# Altium PCB OBDII-Ist.PcbDoc
Units mm, origin at the board's own origin, x right, y up, seen from the top; angles counter-clockwise.
Board outline 60.3 x 40.3 mm, 2 copper layers (Top, Bottom); 77 components, 64 nets, 292 pads, 46 vias.
Unrouted connection lines stored in the file: 5.
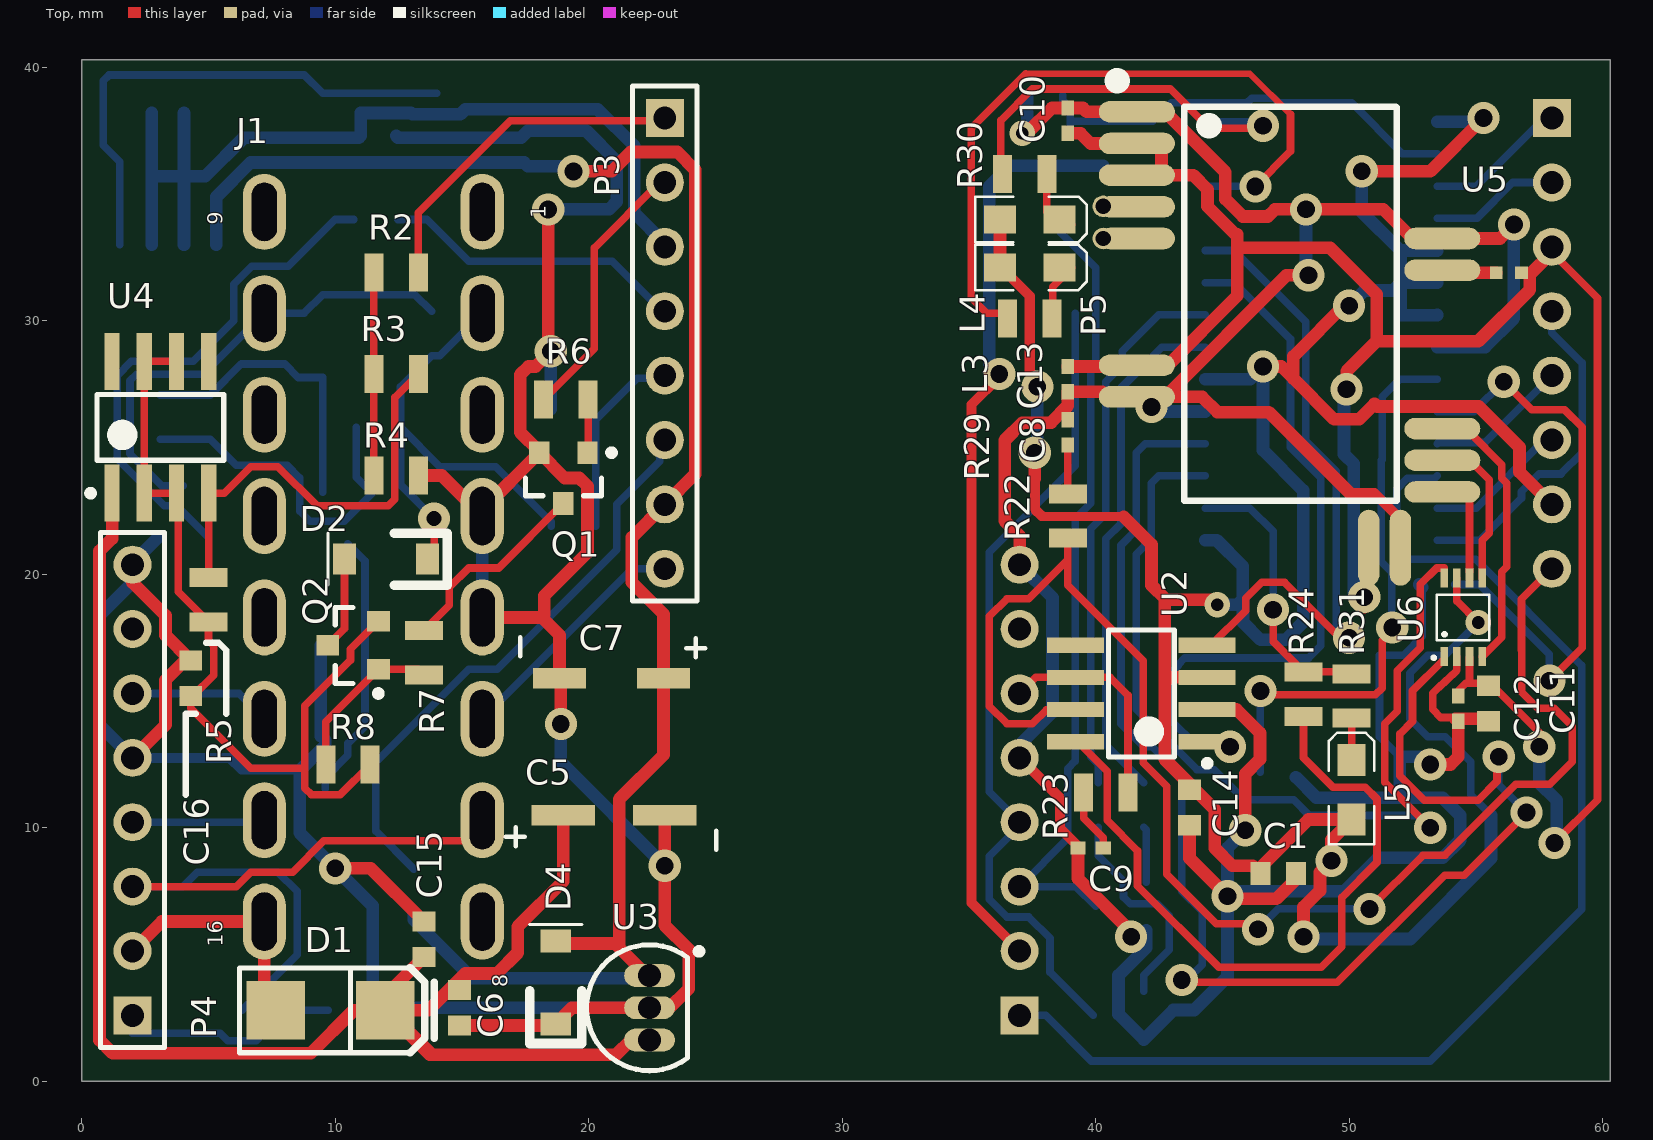
[diagram p0: Top view]
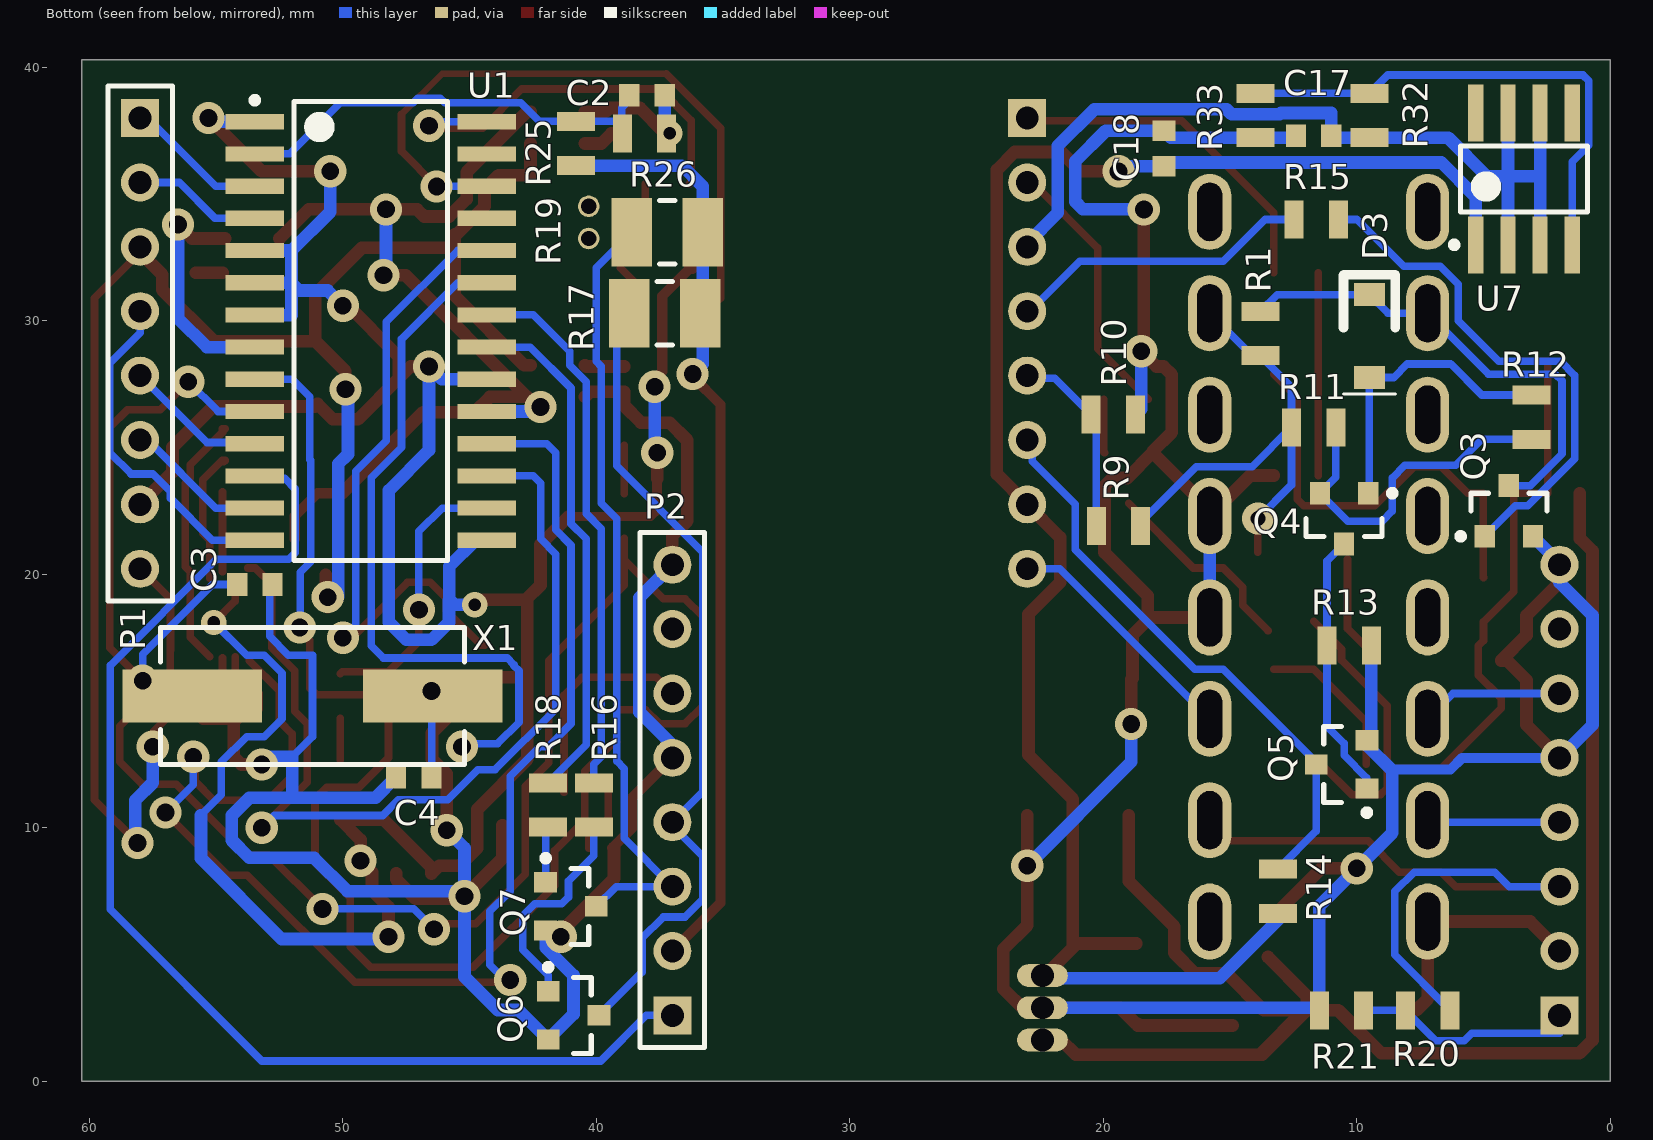
[diagram p1: Bottom view, seen from below]

## Layer stack, top to bottom
Top: signal copper 0.0356
Dielectric: core 0.32, FR-4, Dk 4.8
Bottom: signal copper 0.0356

## Board outline
0,0 0,40.3 60.3,40.3 60.3,0

## Design rules (kind name [scope] priority, off if disabled: settings)
Clearance [All] p1: gap=0.2
PolygonConnect [All] p1: connectstyle=Relief reliefconductorwidth=0.254 reliefentries=4 polygonreliefangle="90 Angle" airgapwidth=0.254
RoomDefinition Power_ [InComponentClass('Power_')] p1: confinementstyle=ConfineIn formatcopy=TRUE lockcomponents=FALSE outline 0,0 25,0 25,40 0,40
RoutingVias [All] p1: holewidth=0.7 width=1.27 viastyle="Through Hole" minholewidth=0.3 minwidth=1.27 maxholewidth=0.7 maxwidth=1.27
SilkscreenOverComponentPads [All] p1: minsilkscreentomaskgap=0.254
SolderMaskExpansion [All] p1: expansion=0.102
Width Width_GND [InNet('GND')] p1: maxlimit=0.5 minlimit=0.2 preferedwidth=0.5
Width Width_5V [InNet('+5V')] p2: maxlimit=0.5 minlimit=0.2 preferedwidth=0.5
Width Width_3.3V [InNet('+3.3V')] p3: maxlimit=0.5 minlimit=0.2 preferedwidth=0.5
Width Width_12V [InNet('+12V')] p4: maxlimit=0.5 minlimit=0.2 preferedwidth=0.5
Width Width_VBAT [InNet('VBAT')] p5: maxlimit=0.5 minlimit=0.2 preferedwidth=0.5
Width [All] p6: maxlimit=0.3 minlimit=0.2 preferedwidth=0.3
27 further rules are at their usual default settings.

## Classes and differential pairs
component class Power_: C5 C6 C7 C15 C16 C17 C18 D1 D2 D3 D4 J1 P3 P4 Q1 Q2 Q3 Q4 Q5 R1 R2 R3 R4 R5 R6 R7 R8 R9 R10 R11 R12 R13 R14 R15 R20 R21 R32 R33 U3 U4 U7
component class OBDII-Ist: C1 C2 C3 C4 C8 C9 C10 C11 C12 C13 C14 L3 L4 L5 P1 P2 P5 Q6 Q7 R16 R17 R18 R19 R22 R23 R24 R25 R26 R29 R30 R31 U1 U2 U5 U6 X1

## Components (designator, comment, footprint, x,y, rotation, side; value= is the part's Value field where it differs from the comment)
C1 "0.1uF" 1608[0603] 47.2,8.2 r0 top
C2 "0.1uF" 1608[0603] 38,38.9 r180 bottom
C3 "27pF" 1608[0603] 53.472,19.6 r180 bottom
C4 "27pF" 1608[0603] 47.2,12 r0 bottom
C5 "2.2uF" Panasonic_Ñ 21,10.5 r270 top
C6 "0.1uF" 1608[0603] 14.9,2.9 r90 top
C7 "10uF" Panasonic_B 20.9,15.9 r90 top
C8 "560pF" 0402 38.9,25.6 r270 top
C9 "560pF" 0402 39.8,9.2 r0 top
C10 "X5R/16V" 0402 38.9,37.9 r90 top
C11 "0.1uF" 1608[0603] 55.5,14.9 r270 top
C12 "X5R/16V" 0402 54.3,14.7 r90 top
C13 "X5R/16V" 0402 38.9,27.7 r90 top
C14 "0.1uF" 1608[0603] 43.7,10.8 r270 top
C15 "0.1uF" 1608[0603] 13.5,5.6 r270 top
C16 "0.1uF" 1608[0603] 4.3,15.9 r270 top
C17 "0.1uF" 1608[0603] 11.7,37.3 r180 bottom
C18 "0.1uF" 1608[0603] 17.6,36.8 r270 bottom
D1 "FM4001-W" SMA,2.8mm 9.8,2.8 r0 top
D2 "MMSD4148T1G" SOD123 12,20.6 r0 top
D3 "MMSD4148T1G" SOD123 9.5,29.4 r90 bottom
D4 "MMSZ5232B" SOD123 18.7,3.9 r270 top
J1 "DEV-09911" "DEV-09911 - II" 11.5,20.3 r90 top
L3 "APT2012SYCK" LED-0805 37.4,32.1 r0 top
L4 "APT2012SYCK" LED-0805 37.4,34 r0 top
L5 "APT2012SYCK" LED-0805 50.1,11.5 r90 top
P1 "68000-108HLF" HDR1X8 58,38 r270 bottom
P2 "68000-108HLF" HDR1X8 37,2.6 r90 bottom
P3 "66951-008LF" HDR1X8 23,38 r270 top
P4 "66951-008LF" HDR1X8 2,2.6 r90 top
P5 "MHDR1X2" MHDR1X2 40.3,33.25 r90 top
Q1 "MMBT3904LT1G" SOT23 19,23.8 r270 top
Q2 "MMBT3906LT1G" SOT23 10.7,17.2 r180 top
Q3 "MMBT3904LT1G" SOT23 4,22.5 r90 bottom
Q4 "MMBT3906LT1G" SOT23 10.5,22.2 r270 bottom
Q5 "MMBT3904LT1G" SOT23 10.6,12.5 r0 bottom
Q6 "MMBT3904LT1G" SOT23 40.9,2.6 r180 bottom
Q7 "MMBT3904LT1G" SOT23 41,6.9 r180 bottom
R1 "22k" ERA-0805 13.8,29.5 r270 bottom
R2 "2.2k" ERA-0805 12.4,31.9 r0 top
R3 "470R" ERA-0805 12.4,27.9 r180 top
R4 "2.2k" ERA-0805 12.4,23.9 r180 top
R5 "470R" ERA-0805 5,19 r270 top
R6 "4.7k" ERA-0805 19.1,26.9 r180 top
R7 "4.7k" ERA-0805 13.5,16.9 r90 top
R8 "10k" ERA-0805 10.5,12.5 r0 top
R9 "10k" ERA-0805 19.4,21.9 r180 bottom
R10 "22k" ERA-0805 19.6,26.3 r0 bottom
R11 "10k" ERA-0805 11.7,25.8 r180 bottom
R12 "47k" ERA-0805 3.1,26.2 r270 bottom
R13 "10k" ERA-0805 10.3,17.2 r180 bottom
R14 "4.7k" ERA-0805 13.1,7.5 r90 bottom
R15 "4.7k" ERA-0805 11.6,34 r0 bottom
R16 "2.2k" ERA-0805 40.1,10.9 r90 bottom
R17 "510R" ERJ-1210 37.3,30.3 r180 bottom
R18 "2.2k" ERA-0805 41.9,10.9 r90 bottom
R19 "510R" ERJ-1210 37.2,33.5 r180 bottom
R20 "47k" ERA-0805 7.2,2.8 r180 bottom
R21 "33k" ERA-0805 10.6,2.8 r180 bottom
R22 "100R" ERA-0805 38.9,22.3 r270 top
R23 "100R" ERA-0805 40.4,11.4 r0 top
R24 "4.7k" ERA-0805 48.2,15.275 r90 top
R25 "47k" ERA-0805 40.8,37 r270 bottom
R26 "10k" ERA-0805 38.1,37.4 r0 bottom
R29 "470R" ERA-0805 37.4,30.1 r0 top
R30 "470R" ERA-0805 37.2,35.8 r0 top
R31 "470R" ERA-0805 50.1,15.2 r270 top
R32 "560" ERA-0805 9.5,38.1 r90 bottom
R33 "750" ERA-0805 14,38.1 r90 bottom
U1 "ELM327SM" SOIC127P1030X264-28N 48.9,29.6 r180 bottom
U2 "MCP2551-I/SN" SOIC8N 41.8,15.3 r180 top
U3 "LP2950-50LPRE3" "TO-92 - II" 22.4,2.9 r0 top
U4 "LM317LM/NOPB" SOIC8N 3.1,25.8 r90 top
U5 "BLE112-A" "BLE112-A - II" 47.6,30.7 r0 top
U6 "TXB0102DCUR" TXB0102DCUR 54.5,18.3 r90 top
U7 "LM317LM/NOPB" SOIC8N 3.4,35.6 r90 bottom
X1 "ABLS-4.000MHZ-B2-T" HC-49/US 51.2,15.2 r180 bottom

## Footprints (in the part's own frame and the unit in brackets; to place one, negate y for a bottom-side part, rotate by r counter-clockwise, add the part's x,y. Pads: shape width x height; smd on the part's side, far side on the other; paste and mask are expansions set on the pad)
0402 [mm] "Chip Capacitor, Body 1.0x0.5mm, IPC High Density"
  rect 0.6x0.5 smd: 1(-0.5,0) 2(0.5,0)
  body extent -0.55,-0.3 0.55,0.3, height 1.3
1608[0603] [mm] "Chip Capacitor, Body 1.6x0.8mm, IPC High Density"
  rect 0.8x0.9 smd: 1(-0.7,0) 2(0.7,0)
  body extent -0.87,-0.48 0.87,0.48, height 1.3
"BLE112-A - II" [mm] "BLE112 Bluetooth Smart Module"
  round 0.85 smd: 1(-7.05,7.55) 1(-4.9,7.55) 2(-7.05,6.3) 2(-4.9,6.3) 3(-7.05,5.05) 3(-4.9,5.05) 4(-7.05,3.8) 4(-4.9,3.8) 5(-7.05,2.55) 5(-4.9,2.55) 9(-7.05,-2.45) 9(-4.9,-2.45) 10(-7.05,-3.7) 10(-4.9,-3.7) 20(3.175,-10.725) 20(3.175,-8.575) 21(4.425,-10.725) 21(4.425,-8.575) 22(5,-7.45) 22(7.15,-7.45) 23(5,-6.2) 23(7.15,-6.2) 24(5,-4.95) 24(7.15,-4.95) 29(5,1.3) 29(7.15,1.3) 30(5,2.55) 30(7.15,2.55)
  rect 2.15x0.85 smd: 1(-5.975,7.55) 2(-5.975,6.3) 3(-5.975,5.05) 4(-5.975,3.8) 5(-5.975,2.55) 9(-5.975,-2.45) 10(-5.975,-3.7) 22(6.075,-7.45) 23(6.075,-6.2) 24(6.075,-4.95) 29(6.075,1.3) 30(6.075,2.55)
  rect 0.85x2.15 smd: 20(3.175,-9.65) 21(4.425,-9.65)
  silkscreen extent -6.76,-7.8 4.27,8.78, body extent -5.98,-9.65 6.08,8.45, height 2.3
"DEV-09911 - II" [mm] "OBD-II Connector"
  oval 3x1.7 hole 1 slot 2.3 at 0 deg: 1(14,-4.3) 2(10,-4.3) 3(6,-4.3) 4(2,-4.3) 5(-2,-4.3) 6(-6,-4.3) 7(-10,-4.3) 8(-14,-4.3) 9(14,4.3) 10(10,4.3) 11(6,4.3) 12(2,4.3) 13(-2,4.3) 14(-6,4.3) 15(-10,4.3) 16(-14,4.3)
  body extent -14.85,-4.7 14.85,4.7, height 4.1
ERA-0805 [mm] "Chip Resistor; Body 2 x 1.25 mm"
  rect 0.75x1.5 smd: 1(-0.875,0) 2(0.875,0)
  body extent -1,-0.63 1,0.63, height 0.5
ERJ-1210 [mm] "Chip Resistor; Body 3.2 x 2.5 mm (LxW typ)"
  rect 1.6x2.7 smd: 1(-1.4,0) 2(1.4,0)
  silkscreen extent -0.3,-1.25 0.3,1.25
HC-49/US [mm]
  rect 5.5x2.1 smd: 1(-4.75,0) 2(4.75,0)
  silkscreen extent -6,-2.7 6,2.7, body extent -5.7,-2.4 5.7,2.4, height 4.3
HDR1X8 [mm] "Connector; Header; 8 Position"
  rect 1.5x1.5 hole 0.9: 1(0,0)
  round 1.5 hole 0.9: 2(2.54,0) 3(5.08,0) 4(7.62,0) 5(10.16,0) 6(12.7,0) 7(15.24,0) 8(17.78,0)
  silkscreen extent -1.27,-1.27 19.05,1.27
LED-0805 [mm] "LED, Body 2 x 1.25 mm"
  rect 1.25x1.1 smd: 1(-1.175,0) 2(1.175,0)
  silkscreen extent -2.15,-0.9 2.25,0.9, body extent -1,-0.63 1,0.63, height 0.75
MHDR1X2 [mm] "Connector; Header; 2 Position"
  round 0.85 hole 0.6: 1(0,0) 2(1.27,0)
Panasonic_B [mm] "Panasonic Ñ size code electrolytic capacitor"
  rect 0.8x2.1 smd paste+0: 1(0,-2.05)
  rect 0.8x2.1 smd: 2(0,2.05)
  silkscreen extent 0.82,-3.7 1.63,3.6
Panasonic_Ñ [mm] "Panasonic Ñ size code electrolytic capacitor"
  rect 0.8x2.5 smd paste+0: 1(0,-2)
  rect 0.8x2.5 smd: 2(0,2)
  silkscreen extent 0.47,-4.28 1.38,4.03
SMA,2.8mm [mm] "DO-214AC/SMA"
  rect 2.3x2.3 smd: 1(-2.15,0) 2(2.175,0)
  silkscreen extent -3.57,-1.68 4.1,1.68, body extent -2.6,-1.3 2.6,1.3, height 2.39
SOD123 [mm] "Diode SOD123, Gull-wing"
  rect 0.91x1.22 smd: 1(-1.635,0) 2(1.635,0)
  silkscreen extent -2.29,-1.02 2.41,1.02, body extent -1.85,-0.8 1.85,0.8, height 1.27
SOIC8N [mm] "SOIC, 8-Leads, Body 5.0x4.0mm (max), Pitch 1.27mm, IPC Medium Density"
  rect 2.25x0.6 smd: 1(-2.6,1.905) 2(-2.6,0.635) 3(-2.6,-0.635) 4(-2.6,-1.905) 5(2.6,-1.905) 6(2.6,-0.635) 7(2.6,0.635) 8(2.6,1.905)
  silkscreen extent -2.73,-2.5 1.3,2.88, body extent -2,-2.5 2,2.5, height 1.75
SOIC127P1030X264-28N [mm] "SOIC, 28-Leads, Body 18.1x7.6mm (max), Pitch 1.27mm, IPC Medium Density"
  rect 2.3x0.6 smd: 1(-4.575,8.255) 2(-4.575,6.985) 3(-4.575,5.715) 4(-4.575,4.445) 5(-4.575,3.175) 6(-4.575,1.905) 7(-4.575,0.635) 8(-4.575,-0.635) 9(-4.575,-1.905) 10(-4.575,-3.175) 11(-4.575,-4.445) 12(-4.575,-5.715) 13(-4.575,-6.985) 14(-4.575,-8.255) 15(4.575,-8.255) 16(4.575,-6.985) 17(4.575,-5.715) 18(4.575,-4.445) 19(4.575,-3.175) 20(4.575,-1.905) 21(4.575,-0.635) 22(4.575,0.635) 23(4.575,1.905) 24(4.575,3.175) 25(4.575,4.445) 26(4.575,5.715) 27(4.575,6.985) 28(4.575,8.255)
  silkscreen extent -4.7,-9.05 3.03,9.23, body extent -3.79,-9.04 3.8,9.04, height 2.64
SOT23 [mm] "SOT23, 3-Leads, Body 3.0x2.6mm, Pitch 0.95mm"
  rect 0.9x0.8 smd: 1(-1,0.95) 2(-1,-0.95) 3(1,0)
  silkscreen extent -1.12,-1.5 0.7,2.03, body extent -1.25,-1.46 1.23,1.46, height 1.01
"TO-92 - II" [mm] "TO, Flat Index; 3 In-Line, Axial Leads; Body Dia. 4.5mm; Leads 0.51 x 0.48 mm (max)"
  oval 2x0.9 hole 0.9: 1(0,1.27) 2(0,0) 3(0,-1.27)
  silkscreen extent -2.48,-2.48 2.07,2.48
TXB0102DCUR [mm] "2-Bit Bidirectional Voltage-Level Translator with Auto Direction Sensing and +/-15-kV ESD Protect"
  rect 0.75x0.3 smd: 1(-1.55,0.75) 2(-1.55,0.25) 3(-1.55,-0.25) 4(-1.55,-0.75) 5(1.55,-0.75) 6(1.55,-0.25) 7(1.55,0.25) 8(1.55,0.75)
  silkscreen extent -1.6,-1.04 0.9,1.17, body extent -1.2,-1.05 1.2,1.05, height 0.9

## Part data
C1 C2 C11 C14 C15 C16: library part CGA3E2X7R1E104K080AA, "Surface-Mount Ceramic Multilayer Capacitor, 0.1uF, X7R, 10% Tolerance, 0603 Size, 25V"
C3 C4: library part CC0603JRNPO9BN270, "Surface-Mount Ceramic Multilayer Capacitor, 27pF, 5% Tolerance, 0603 Size, 50V"
C5: library part EEE-1HA2R2NR, "CAP ELECT 2.2UF SV 50V SMD"
C6 C17 C18: library part C0603C104K5RACTU, "Surface-Mount Ceramic Multilayer Capacitor, 0.1uF, 10% Tolerance, 0603 Size, 50V"
C7: library part EEE-1AA100NR, "CAP ELECT 10UF SV 10V SMD"
C8 C9: library part C0402C561J5GACTU, "Surface-Mount Ceramic Multilayer Capacitor, 560pF, 5% Tolerance, 0402 Size, 50V"
C10 C12 C13: library part "Cap Semi", "Capacitor (Semiconductor SIM Model)"
D1: "1 Amp 50V  Rectifier"
D2 D3: "High Conductance Fast Diode"
D4: "Zener Diodes 5.6 Volt 0.5W 5%"
J1: library part OBDII_DEV-09911, "OBD-II Connector"
L3 L4 L5: "Typical BLUE SiC LED"
P1 P2: "Header, 8-Pin, 2.54 pitch, 1 row"
P3 P4: "Connector, 8-Pin, 2.54 pitch, 1 row"
P5: "Header, 2-Pin"
Q1 Q3 Q5 Q6 Q7: library part MMBT3904L, "NPN 3904 General Purpose Amplifier"
Q2 Q4: library part MMBT3906L, "PNP 3906 General Purpose Amplifier"
R1 R10: library part ERA6AEB223V, "Rectangular Thick Film Chip Resistor, 22 kOhm, 0.1% Tolerance, 0805 Size, 0.125 W"
R2 R4 R16 R18: library part ERA6AEB222V, "Rectangular Thick Film Chip Resistor, 2.2 kOhm, 0.1% Tolerance, 0805 Size, 0.125 W"
R3 R5 R29 R30 R31: library part ERA6AEB471V, "Rectangular Thick Film Chip Resistor, 470 Ohm, 0.1% Tolerance, 0805 Size, 0.125 W"
R6 R7 R14 R15 R24: library part ERA6AEB472V, "Rectangular Thick Film Chip Resistor, 4.7 kOhm, 0.1% Tolerance, 0805 Size, 0.125 W"
R8 R9 R11 R13 R26: library part ERA6AEB103V, "Rectangular Thick Film Chip Resistor, 10 kOhm, 0.1% Tolerance, 0805 Size, 0.125 W"
R12 R20 R25: library part ERA6AEB473V, "Rectangular Thick Film Chip Resistor, 47 kOhm, 0.1% Tolerance, 0805 Size, 0.125 W"
R17 R19: library part ERJ14NF5100U, "Rectangular Thick Film Chip Resistor, 510 Ohm, 1% Tolerance, 1210 Size, 0.5 W"
R21: library part ERA6AEB333V, "Rectangular Thick Film Chip Resistor, 33 kOhm, 0.1% Tolerance, 0805 Size, 0.125 W"
R22 R23: library part ERA6AEB101V, "Rectangular Thick Film Chip Resistor, 100 Ohm, 0.1% Tolerance, 0805 Size, 0.125 W"
R32: library part ERJ6ENF5600V, "Rectangular Thick Film Chip Resistor, 560 Ohm, 1% Tolerance, 0805 Size, 0.125 W"
R33: library part ERJ6ENF7500V, "Rectangular Thick Film Chip Resistor, 750 Ohm, 1% Tolerance, 0805 Size, 0.125 W"
U1: library part ELM327_SOIC, "OBDII Interpreter IC"
U2: "IC TRANSCEIVER CAN HI-SPD 8-SOIC"
U3: "Adjustable Micropower Voltage Regulator With Shutdown; 5V; 100 mA"
U4 U7: library part LM317LM, "3-terminal adjustable regulator in SO8"
U5: "BLE112 Bluetooth Smart Module"
U6: "2-Bit Bidirectional Voltage-Level Translator with Auto Direction Sensing and +/-15-kV ESD Protect"
X1: "CRYSTAL 4.000 MHZ 18PF SMD"

## Free pads (board coordinates)
  rect 0.5x0.5 smd: 0(55.8,31.9) 0(56.8,31.9)

## Via types
v1: diameter 1.27, hole 0.7, Top to Bottom, tented both sides, 36 vias
v2: diameter 1, hole 0.5, Top to Bottom, tented both sides, 3 vias
v3: diameter 1.27, hole 0.711, Top to Bottom, tented both sides, 2 vias
v4: diameter 1.27, hole 0.7, Top to Bottom, tented bottom, 2 vias
v5: diameter 1.27, hole 0.7, Top to Bottom, tented top, 2 vias
v6: diameter 1.27, hole 0.6, Top to Bottom, tented both sides, 1 vias

## Nets (pads, with @x,y where several pads share a name; then routed paths per layer and width w, separated by ;. In a path a pad name is that pad's centre, name@x,y a point inside that pad or via, vN(x,y) a via of type N, cw(c..) or ccw(c..) an arc to the next point about the centre after c; other vN are vias at no path point)
+3.3V: C10.1 C11.1 C12.2 C13.2 C17.2 P1.3 P3.3 pad.0 R32.1 U5.2 U5.3 U5.9 U5.20 U5.29 U6.3 U7.2 U7.3 U7.6 U7.7 | length 116.7
  Top w0.3: C12.2@54.2,15.3 54.6,15.7 C11.1@55.5,15.7 ; 54.75,15.7 U6.3@54.75,16.7 ; C11.1@55.665,15.6 57.5,13.765 v1(57.5,13.2) ; P1.3@58,32.7 59.8,30.9 59.8,11.1 v1(58.1,9.4)
  Top w0.5: C13.2 40.4,28.2 U5.9@40.45,28.25 ; 39.2,37.4 39.4,37.4 39.8,37 U5.2@40.45,37 ; U5.9@42.6,28.25 42.847,28.25 45.582,30.985 45.582,33 ; U5.2@42.6,37 42.6,35.75 43.85,35.75 44.415,35.185 44.415,34.519 45.519,33.415 45.582,33.415 45.582,33 ; v1(49.9,27.3) 49.9,28.011 51.085,29.196 ; v1@50.6,18.7 v1@50.675,18.775 ; U5.20@50.675,19.975 v1@50.675,18.775 ; v1@50.785,18.885 v1@50.675,18.775 ; U5.29@54.75,31.9 pad.0@55.8,31.9 ; C11.1 C11.1@55.665,15.6 ; P1.3@58,32.7 57.124,31.824 57.124,31.224 55.096,29.196 51.085,29.196 ; 45.582,33 45.697,32.885 49.249,32.885 51.085,31.049 51.085,29.196
  Bottom w0.5: U7.3 2.765,35.7 ; U7.6 2.765,35.7 ; U7.2 4.035,35.7 ; U7.7 4.035,35.7 ; P3.3 23,33.06 21.8,34.26 21.8,36.9 20.35,38.35 15.136,38.35 14.936,38.15 13.036,38.15 12.986,38.2 11,38.2 C17.2 10.925,37.225 R32.1 6.391,37.225 4.866,35.7 4.035,35.7 ; v1(49.9,27.3) 49.8,27.2 49.8,24.738 50.185,24.353 v1@50.185,19.115 ; v1@50.185,19.215 v1@50.6,18.8 ; v1(57.5,13.2) 57.5,11.776 58.185,11.091 58.185,9.485 v1(58.1,9.4) ; 2.765,35.7 4.035,35.7
  other v1: 50.6,19.1
+5V: C1.1 C7.1 C14.1 C18.2 D4.1 L3.1 L4.1 L5.1 P1.7 P3.7 R14.1 U1.1 U1.5 U1.6 U1.7 U1.15 U1.20 U2.3 U3.1 U6.7 U7.1 | length 199.4
  Top w0.3: U6.7 54.25,18.95 v2(55.1,18.1)
  Top w0.35: 37.9,22.3 37.925,22.275 41.103,22.275
  Top w0.4: L3.1@36.286,32.1 37.35,31.036 ; 37.4,30.986 37.4,30.1 37.4,28 v1@37.9,27.5 ; 37.6,23.778 37.6,22.572 37.872,22.3 37.9,22.3
  Top w0.5: D4.1@18.7,5.435 21.035,5.435 21.2,5.27 ; v3(19.4,35.9) 20.896,35.9 21.656,36.66 23.497,36.66 24.2,35.957 24.2,23.96 P3.7 21.7,21.46 21.7,19.682 22.95,18.432 C7.1 22.95,12.878 21.2,11.128 21.2,5.27 ; U3.1@22.4,4.07 21.2,5.27 ; L3.1 L3.1@36.286,32.1 ; L3.1@36.225,32.2 L4.1@36.225,33.8 ; 37.6,23.778 v1(37.6,24.8) ; 41.103,22.275 42.2,21.178 42.2,19.571 42.771,19 ; U2.3 42.935,15.935 42.725,15.725 ; v2@44.6,19 42.771,19 ; v1(46.6,28.2) 47.324,28.2 47.8,27.724 ; v1(48.2,5.7) 48.2,6.872 48.85,7.522 48.85,8.25 v1(49.3,8.7) 49.3,9.525 L5.1 48.397,10.325 46.5,8.428 C1.1 46.2,8.5 45.4,8.5 44.7,9.2 44.7,10.728 42.725,12.703 42.725,15.725 ; v1@49.9,30.7 47.8,28.6 47.8,27.724 ; v1(50.5,35.9) 53.2,35.9 v1(55.3,38) ; P1.7 56.725,24.035 56.725,25.012 55.112,26.625 51.101,26.625 51.001,26.725 50.391,26.115 49.409,26.115 47.8,27.724 ; 42.725,15.725 42.725,18.954 42.771,19
  Bottom w0.3: v2(55.1,18.1) 53.8,16.8 53.1,16.8 52.4,16.1 52.4,14.3 53.1,13.6 53.8,13.6 54.8,12.6 54.8,11.3 55.6,10.5
  Bottom w0.5: U7.1 5.305,34.893 6.662,36.25 17.45,36.25 C18.2 19.2,36.1 v3(19.4,35.9) ; R14.1 13.1,6.37 15.4,4.07 U3.1@22.4,4.07 ; v1(37.6,24.8) 37.7,24.9 v1(37.7,27.4) ; U1.15 44.779,21.345 45.8,20.324 45.8,19 ; U1.20 44.33,27.7 46.1,27.7 v1(46.6,28.2) 46.6,24.9 48.185,23.315 48.185,18.109 47.491,17.415 46.509,17.415 45.815,18.109 45.815,18.985 45.8,19 ; v2(44.8,18.8) 45.6,18.8 45.8,19 ; v1(48.2,5.7) 48.285,5.615 52.415,5.615 55.6,8.8 55.6,10.5 ; v1(50,30.6) 50.6,31.2 51.725,31.2 52.025,31.5 ; v1(50.5,35.9) 50.5,34.3 52.025,32.775 ; U1.6@53.47,31.5 52.025,31.5 ; U1.7 53.465,30.225 52.025,30.225 52.025,31.5 ; U1.5 52.025,32.775 ; U1.1 v1@55.155,37.855 ; 52.025,31.5 52.025,32.775
+12V: C5.1 C6.2 C15.2 D1.2 U3.3 U4.1 | length 62.8
  Top w0.5: U4.1 1.195,21.413 0.7,20.918 0.7,1.622 1.222,1.1 9.028,1.1 10.728,2.8 D1.2 ; C15.2 11.975,3.375 D1.2 ; C5.1 19,7.9 17.2,6.1 17.2,5.07 16.38,4.25 15.122,4.25 13.672,2.8 12.072,2.8 13.822,1.05 ; U3.3 21.667,1.63 21.087,1.05 13.822,1.05 ; D1.2 13.725,1.05 13.822,1.05
"CAN-H 6": P1.8 R22.2 U2.7 | length 55.3
  Top w0.3: R22.2 38.9,20.583 ; U2.7 38.062,14.665 37.497,14.1 36.503,14.1 35.8,14.803 35.8,18.337 36.503,19.04 37.357,19.04 38.9,20.583 ; v1(46.4,6) 46.185,6.215 44.751,6.215 42.8,8.166 42.8,11.636 41.875,12.561 41.875,16.591 38.9,19.566 38.9,20.583 ; v1(50.8,6.8) 52.915,8.915 53.781,8.915 56.581,11.715 57.915,11.715 58.8,12.6 58.8,14 58.085,14.715 57.451,14.715 56.815,15.351 56.815,16.985 56.8,17 56.8,19.02 P1.8
  Bottom w0.3: v1(46.4,6) 47.2,6.8 v1(50.8,6.8)
CAN-H_P: J1.6 P3.8 | length 9.7
  Bottom w0.3: J1.6 21.72,20.22 P3.8
"CAN-L 14": P2.6 R23.2 U2.6 | length 8.7
  Top w0.3: P2.6 37.635,15.935 U2.6 40.565,15.935 41.275,15.225 R23.2
CAN-L_P: J1.14 P4.6 | length 5.6
  Bottom w0.3: P4.6 6.2,15.3 J1.14
GND: C1.2 C2.2 C3.2 C4.2 C5.2 C6.1 C7.2 C8.1 C9.1 C10.2 C11.2 C12.1 C13.1 C14.2 C15.1 C16.1 C17.1 C18.1 D4.2 J1.4 J1.5 P2.5 P2.8 P4.5 P4.8 Q1.2 Q3.2 Q5.2 Q6.2 Q7.2 R4.1 R10.1 R13.2 R21.1 R26.1 R33.1 U1.8 U1.19 U2.2 U3.2 U5.1 U5.10 U5.21 U5.30 U6.2 | length 279.4
  Top w0.3: C12.1@54.2,14.3 54.15,14.35 53.622,14.35 53.3,14.672 53.3,15.3 53.537,15.537 54.225,16.175 54.25,16.25 U6.2
  Top w0.4: P2.5 38.6,11.16 38.6,9.972 C9.1@39.372,9.2 ; 50.03,23.2 50.9,23.2 ; 51,23.2 51.9,22.3 U5.21@51.9,21.4
  Top w0.5: P4.5 3.3,14.06 3.3,15.828 4.072,16.6 C16.1 3.3,17.6 3.3,18.378 2,19.678 P4.8 ; v1(10,8.4) 11.4,8.4 C15.1@13.4,6.4 ; R4.1 14.2,23.9 J1.4 ; C6.1 D4.2@18.635,2.2 ; J1.5 18.15,18.3 ; J1.4@15.8,22.55 Q1.2 ; v1@18.4,28.9 v3(18.4,34.4) ; v1(18.5,28.8) 17.9,28.2 17.622,28.2 17.3,27.878 17.3,25.6 18.05,24.85 Q1.2 ; D4.2@18.635,2.265 D4.2 19.335,2.9 U3.2 ; C7.2 18.85,17.6 18.15,18.3 ; v1(18.9,14.1) C7.2@18.9,15.85 ; U3.2@22.4,2.8 23.094,2.8 23.95,3.656 23.95,5.201 23,6.151 C5.2 ; P2.8 37,21.527 36.415,22.112 36.415,25.291 37.109,25.985 38.235,25.985 38.9,26.65 C13.1 40.25,27.2 U5.10@40.45,27 ; v2@37.34,37.46 38.28,38.4 C10.2 39.5,38.4 39.65,38.25 U5.1@40.45,38.25 ; C9.1 39.3,8 v1@41.4,5.9 ; U5.1@42.6,38.25 42.729,38.25 45.115,35.864 45.115,34.809 45.809,34.115 46.791,34.115 47.076,34.4 v1(48.3,34.4) 51.35,34.4 U5.30@52.5,33.25 ; C14.2 43.7,8.8 v1(45.2,7.3) 45.3,7.2 47.128,7.2 47.9,7.972 C1.2 ; U2.2 45.559,14.665 46.485,13.739 46.485,12.709 45.9,12.124 v1(45.9,9.9) ; v1(48.4,31.8) 47.529,31.8 42.729,27 44.2,27 44.8,26.4 46.83,26.4 50.03,23.2 ; v1(53.2,12.5) 54,12.5 54.3,12.8 C12.1@54.3,14.3 ; C12.1@54.2,14.3 C12.1@54.3,14.3 ; U5.30@54.65,33.25 55.95,33.25 v1(56.5,33.8) ; C11.2@55.5,14.3 C12.1@54.3,14.3 ; Q1.2 19.05,23.8 19.628,23.8 19.95,23.478 19.95,20.86 18.25,19.16 18.25,18.4 18.15,18.3
  Bottom w0.3: 52,12.8 51.2,13.6 51.2,16.8 51.215,16.815 52.149,16.815 52.885,17.551 C3.2@52.885,19.487
  Bottom w0.4: P4.5 5.84,12.76 6.3,12.3 8.6,12.3
  Bottom w0.5: P4.5 0.7,14.06 0.7,18.378 2,19.678 P4.8 2,20.45 Q3.2 ; Q5.2@9.425,13.625 R13.2 ; Q5.2 9.6,13.254 8.6,12.254 8.6,9.8 v1(10,8.4) 11.475,6.925 R21.1 11.575,2.9 U3.2 ; C17.1 12.475,37.225 R33.1 17.325,37.225 C18.1 19.9,37.5 21.1,36.3 21.1,34.7 20.8,34.4 v3(18.4,34.4) ; J1.5 J1.4 ; R10.1@18.5,26.525 v1(18.5,28.8) ; v1(18.9,14.1) 18.9,12.6 v1(23,8.5) ; P2.5 37,13.262 38.3,14.562 38.3,19.08 P2.8 ; v2(37.1,37.4) 37.3,37.6 C2.2 ; Q7.2 42,5.278 40.9,4.178 40.9,2.65 Q6.2 43.065,2.815 43.891,2.815 45.2,4.124 v1(45.2,7.3) ; v4(42.2,26.6) 42.375,26.425 U1.19 ; v1(45.9,9.9) 45.2,9.2 v1(45.2,7.3) ; C4.2 48.715,11.185 52,11.185 ; v1(48.3,34.4) 48.3,31.9 v1(48.4,31.8) ; C3.2 C3.2@52.885,19.487 ; v1(53.2,12.5) 52.9,12.8 52,12.8 52,11.185 ; U1.8 55.365,28.965 56.5,30.1 v1(56.5,33.8) ; v1(45.2,7.3) 45.4,7.5 49.824,7.5 51.139,8.815 53.691,8.815 54.385,9.509 54.385,10.491 53.691,11.185 52,11.185
  other v1: 41.4,5.7
ISO_IN: P2.1 U1.12 | length 48.5
  Bottom w0.3: P2.1 38.026,2.6 39.826,0.8 53.2,0.8 59.185,6.785 59.185,11.2 59.185,16.401 54.991,20.595 52.139,20.595 51.875,20.859 51.875,23.365 52.3,23.79 53.38,23.79 U1.12
ISO_IN_P: P4.1 R20.1 R21.2 | length 8.4
  Bottom w0.3: P4.1@2,1.9 5.464,1.9 5.764,1.6 6.886,1.6 R20.1@8.086,2.8 ; R20.1 R20.1@8.086,2.8 ; R21.2 R20.1@8.086,2.8
ISO_K: P2.3 Q7.3 R19.1 | length 31
  Bottom w0.3: R19.1 40,32.1 40,28.4 39.8,28.2 39.8,22.8 39.2,22.2 39.2,12.636 38.9,12.336 38.9,9.58 P2.3 39.22,7.68 Q7.3
ISO_K_P: J1.7 P4.3 R20.2 | length 26.4
  Top w0.3: P4.3 6.092,7.68 6.662,8.25 8.316,8.25 9.551,9.485 J1.7@14.985,9.485
  Bottom w0.3: P4.3 3.985,7.68 4.555,8.25 7.738,8.25 8.5,7.488 8.5,4.986 6.325,2.811 R20.2
ISO_L: P2.4 Q6.3 R17.1 | length 32.3
  Bottom w0.3: R17.1@39.2,30.3 39.2,24.277 35.8,20.877 35.8,11.42 P2.4 37,10.08 35.8,8.88 35.8,7.183 36.503,6.48 37.357,6.48 38.2,5.637 38.2,4.3 Q6.3
ISO_L_P: J1.15 P4.4 | length 5.1
  Bottom w0.3: P4.4 J1.15@7.12,10.22
J1850_BUS+: P1.2 U1.4 | length 5.1
  Bottom w0.3: U1.4 55.045,34.045 56.46,35.46 P1.2
J1850_BUS+_P: P3.2 R6.2 | length 10.5
  Top w0.3: R6.2 18.225,26.911 20.214,28.9 20.214,32.874 P3.2@22.8,35.46
J1850_BUS-: P1.4 U1.14 | length 13.4
  Bottom w0.3: U1.14 55.145,21.345 56.8,23 56.8,23.257 57.503,23.96 58.357,23.96 59.2,24.803 59.2,28.337 58,29.537 P1.4
J1850_BUS-_P: P3.4 R15.2 | length 12.1
  Bottom w0.3: R15.2 13.612,34 15.262,32.35 20.93,32.35 P3.4@23,30.28
J1850_VOLTS: P1.1 U1.3 | length 5.6
  Bottom w0.3: U1.3 55.015,35.315 57.7,38 P1.1
J1850_VOLTS_P: P3.1 R2.2 | length 13.6
  Top w0.3: R2.2 13.275,34.263 16.912,37.9 P3.1@23,37.9
NetC2_1: C2.1 R25.1 R26.2 U1.2 | length 17
  Bottom w0.3: C2.1 38.7,38.7 39,38.4 R26.2@39,37.65 ; R26.2@39.1,37.875 R25.1 42.259,37.875 42.989,38.605 45.971,38.605 46.15,38.785 47.049,38.785 47.229,38.605 50.095,38.605 52.1,36.6 53.46,36.6 U1.2
NetC3_1: C3.1 U1.10 X1.1 | length 23.4
  Top w0.3: v1(56.1,27.6) 57.2,26.5 58.497,26.5 59.2,25.797 59.2,17.1 v5(57.9,15.8)
  Bottom w0.3: U1.10 54.925,26.425 v1(56.1,27.6) ; C3.1 55.138,19.6 57.9,16.838 v5(57.9,15.8)
NetC4_1: C4.1 U1.9 X1.2 | length 22.8
  Top w0.3: v5(46.5,15.4) 46.375,15.275 46.4,15.25 51.036,15.25 51.3,15.514 51.3,17.4 v1@51.7,17.8
  Bottom w0.3: X1.2@46.25,15.4 X1.2 46.5,15.15 C4.1@46.5,12.2 ; v1@51.7,17.8 51.685,17.815 51.685,20.09 51.275,20.5 51.275,24.496 51.3,24.521 51.3,27 51.995,27.695 U1.9
  other v1: 51.7,17.9
NetC8_2: C8.2 R22.1 | length 1.9
  Top w0.3: R22.1 C8.2
NetC9_2: C9.2 R23.1 | length 2.5
  Top w0.3: R23.1 39.525,10.375 40.3,9.6 C9.2
NetC16_2: C16.2 Q2.2 R5.2 R8.2 U4.2 U4.3 U4.6 U4.7 | length 33.7
  Top w0.3: U4.6 U4.7 U4.2 U4.3 3.8,23.135 3.8,19.314 R5.2@5,18.114 ; R5.2 R5.2@5,18.114 ; R8.2@11.375,12.489 10.186,11.3 9.064,11.3 8.8,11.564 8.8,12.3 ; Q2.2 10.6,17.05 10.6,16.614 8.8,14.814 8.8,12.3 ; R5.2@5,18.114 5,17.386 5.2,17.186 5.2,16.014 4.386,15.2 C16.2 4.3,14.712 6.662,12.35 8.75,12.35 8.8,12.3
NetD2_1: D2.1 Q2.3 | length 3.7
  Top w0.3: Q2.3 10.365,17.865 D2.1
NetD2_2: D2.2 J1.2 R1.2 R9.2 R11.1 | length 19.2
  Top w0.3: D2.2@13.9,20.865 v6(13.9,22.2)
  Bottom w0.3: v6(13.9,22.2) 12.575,23.525 R11.1 ; J1.2 14.125,28.625 R1.2 12.575,27.4 R11.1 ; R9.2 18.525,22.063 16.338,24.25 14.125,24.25 R11.1
NetD3_1: D3.1 Q4.1 R12.1 | length 11.6
  Bottom w0.3: R12.1 5.075,27.075 6.3,28.3 8,28.3 8.535,27.765 D3.1 Q4.1@9.5,23.25
NetD3_2: D3.2 J1.10 Q3.3 R1.1 | length 19.1
  Bottom w0.3: Q3.3 3.164,23.5 1.9,24.764 1.9,27.636 2.164,27.9 4.8,27.9 J1.10 8.765,30.3 D3.2 13.14,31.035 R1.1
NetL3_2: L3.2 R29.2 | length 2.1
  Top w0.3: R29.2@38.3,30.3 38.3,31.353 L3.2@39.047,32.1
NetL4_2: L4.2 R30.2 | length 2.2
  Top w0.3: R30.2@38.075,35.4 38.075,34.3 L4.2@38.575,33.8 ; L4.2@38.747,34.1 L4.2@39.047,33.8
NetL5_2: L5.2 R31.2 | length 1.7
  Top w0.3: L5.2 R31.2
NetP5_1: P5.1 U5.5
NetP5_2: P5.2 U5.4
NetQ1_1: Q1.1 R6.1 | length 2.1
  Top w0.3: Q1.1 19.975,24.825 R6.1
NetQ1_3: Q1.3 R7.2 | length 8
  Top w0.3: R7.2 14.5,18.775 14.5,19.488 15.262,20.25 16.45,20.25 Q1.3
NetQ2_1: Q2.1 R7.1 R8.1 | length 6.2
  Top w0.3: R8.1 9.625,14.175 Q2.1 R7.1@13.275,16.25
NetQ3_1: Q3.1 R15.1 | length 20.8
  Bottom w0.3: Q3.1 3.75,22.7 3.257,22.7 1.4,24.557 1.4,27.844 1.956,28.4 4.4,28.4 6,30 6,31.447 6.703,32.15 8.15,32.15 10,34 R15.1
NetQ4_2: Q4.2 R11.2 R12.2 | length 13.8
  Bottom w0.3: R12.2 5.075,25.325 6.1,24.3 8.1,24.3 8.6,23.8 8.6,22.5 9,22.1 10.35,22.1 Q4.2 10.825,23.825 R11.2
NetQ4_3: Q4.3 Q5.1 R13.1 | length 10.6
  Bottom w0.3: Q5.1 9.6,11.964 10.5,12.864 10.5,13.325 11.175,14 R13.1 11.175,20.525 Q4.3
NetQ6_1: Q6.1 R16.1 | length 8.7
  Bottom w0.3: R16.1 40.1,8.9 41.1,7.9 41.1,7.264 41.364,7 42.436,7 42.9,6.536 42.9,5.188 41.9,4.188 Q6.1
NetQ7_1: Q7.1 R18.1 | length 2.2
  Bottom w0.3: R18.1 42,9.925 Q7.1
NetR2_1: R2.1 R3.2 R4.2 | length 8
  Top w0.3: R4.2 R3.2 R2.1
NetR3_1: R3.1 R5.1 U4.4 | length 17.2
  Top w0.3: R5.1 5.005,19.88 U4.4 5.612,23.2 6.662,24.25 7.738,24.25 9.288,22.7 12.086,22.7 12.35,22.964 12.35,26.975 R3.1
NetR16_2: R16.2 U1.22 | length 21.5
  Bottom w0.3: R16.2 40.1,12.5 39.8,12.8 39.8,21.8 40.4,22.4 40.4,27.6 41.05,28.25 41.05,28.799 42.486,30.235 U1.22
NetR18_2: R18.2 U1.21 | length 20.4
  Bottom w0.3: R18.2 40.4,13.275 40.4,21.4 41,22 41,27.351 42.614,28.965 U1.21
NetR24_1: R24.1 U2.8 | length 28.1
  Top w0.3: U2.8 39.291,13.395 40.45,12.236 40.45,10.299 41.65,9.099 41.65,7.716 44.866,4.5 48.9,4.5 49.715,5.315 49.715,7.249 51.1,8.634 51.1,11.136 50.636,11.6 49.364,11.6 48.2,12.764 R24.1
NetR24_2: R24.2 R31.1 U1.16 | length 10.4
  Top w0.3: v1(47,18.6) 47,17.35 R24.2 50.025,16.15 R31.1
  Bottom w0.3: U1.16 46.085,22.615 47,21.7 v1@47,19.2
NetR29_1: R29.1 U1.26 | length 27.3
  Top w0.25: 37.247,39.75 46.084,39.75 47.685,38.149
  Top w0.3: R29.1@36.525,30.3 35.7,30.3 35.097,30.903 35.097,37.6 37.247,39.75 ; v1(46.3,35.3) 47.685,36.685 47.685,38.149
  Bottom w0.3: U1.26 v1@45.685,35.315
NetR30_1: R30.1 U1.28 | length 16.8
  Top w0.3: R30.1@36.325,35.4 36.25,35.475 36.25,37.904 37.496,39.15 42.937,39.15 44.487,37.6 v1@46.6,37.6
  Bottom w0.3: U1.28 v1@46.945,37.855 ; v1@46.6,37.6 v1(46.6,37.7)
NetR32_2: R32.2 R33.2 U7.4 | length 20.3
  Bottom w0.3: U7.4 1.495,36.28 0.845,36.93 0.845,39.47 1.075,39.7 8.775,39.7 R32.2 R33.2
NetU1_17: U1.17 U6.8 | length 37.1
  Top w0.3: v1(53.2,10) 51.4,11.8 51.4,14.1 51.9,14.6 51.9,16.2 52.8,17.1 52.8,19.6 53.45,20.25 53.75,20.25
  Bottom w0.3: U1.17 42.485,23.885 42.2,23.6 42.2,21.4 41.6,20.8 41.6,14.685 44,12.285 44.681,12.285 45.866,11.1 47.81,11.1 48.425,10.485 52.715,10.485 v1(53.2,10)
NetU1_18: U1.18 U6.1 | length 55.7
  Top w0.3: v1(43.4,4) 43.5,3.9 49.534,3.9 53.767,8.133 54.533,8.133 v1(57,10.6) ; U6.1@53.7,16.6 52.5,15.4 52.5,14.2 52,13.7 52,12.049 52.964,11.085 55.085,11.085 55.834,11.834 v1@55.834,12.8
  Bottom w0.3: v1(43.4,4) 43.6,4 44.2,4.6 44.2,6.7 43.4,7.5 43.4,12.036 42.236,13.2 41.9,13.2 41,14.1 41,21.151 41.6,21.751 41.6,24.8 41.955,25.155 U1.18 ; v1(55.9,12.8) 55.9,11.7 v1(57,10.6)
NetU1_23: U1.23 U2.1 | length 27.8
  Bottom w0.3: U1.23 45.465,31.505 47.685,29.285 47.685,25.015 48.885,23.815 48.885,17.185 48.4,16.7 43.514,16.7 43.25,16.436 43.25,16.4 43.05,16.2 43.05,14.164 43.9,13.314 45.186,13.314 v4(45.3,13.2)
NetU1_24: U1.24 U2.4 | length 26.1
  Top w0.3: U2.4 44.549,17.205 45.915,18.571 45.915,19.049 46.551,19.685 47.449,19.685 49.634,17.5 v1(50,17.5)
  Bottom w0.3: U1.24 45.474,32.775 48.285,29.964 48.285,25.264 49.485,24.064 49.485,18.015 v1(50,17.5)
NetU5_22: U5.22 U6.6 | length 3.1
  Top w0.3: U6.6@54.75,20.1 U5.22@54.75,23.25
NetU5_23: U5.23 U6.5 | length 5.2
  Top w0.3: U5.23@54.65,24.5 54.65,24.487 U5.23@54.694,24.444 ; U5.23@54.75,24.5 55.525,23.725 55.525,21.625 55.25,21.35 U6.5
NetU5_24: U5.24 U6.4 | length 10.2
  Top w0.3: U5.24@54.65,25.75 54.65,25.737 U5.24@54.75,25.637 ; U5.24@54.75,25.75 U5.24@54.75,25.637 ; U6.4 56.025,17.525 56.025,20.1 56.225,20.3 56.225,23.6 56.025,23.8 56.025,24.321 54.75,25.596 U5.24@54.75,25.637
PWM_IN: P1.6 U1.13 | length 5.6
  Bottom w0.3: U1.13 55.015,22.615 57.7,25.3 P1.6
PWM_IN_P: P3.6 Q5.3 R14.2 | length 22.8
  Bottom w0.3: R14.2 11.6,9.875 Q5.3 11.6,12.588 15.262,16.25 16.386,16.25 21.1,20.964 21.1,22.757 22.8,24.457 P3.6@22.8,25.3
VBAT: D1.1 J1.16 P2.2 P4.2 R17.2 R19.2 R25.2 | length 46.1
  Top w0.4: v1@36.2,27.8 35.1,26.7 35.1,7.04 P2.2
  Top w0.5: P4.2 3.16,6.3 J1.16 7.2,3.25 D1.1 ; P2.2 P2.2@37,5.342
  Bottom w0.5: v1(36.2,27.9) 35.8,28.3 R19.2 35.8,35.3 36.625,36.125 R25.2@40.3,36.125 ; v1@36.4,27.7 v1@36.4,27.9
VPW_IN: P1.5 U1.11 | length 5.6
  Top w0.3: P1.5 P1.5@58.006,27.84
  Bottom w0.3: U1.11 53.52,25.2 55.36,25.2 P1.5
VPW_IN_P: P3.5 R9.1 R10.2 | length 7.6
  Bottom w0.3: R9.1 20.275,26.1 R10.2 21.915,27.74 P3.5@23,27.74
pads on no net: J1.1 J1.3 J1.8 J1.9 J1.11 J1.12 J1.13 P2.7 P4.7 U1.25 U1.27 U2.5 U4.5 U4.8 U7.5 U7.8

## Silkscreen, mask and mechanical layers (free items; w line width, h text height)
Top Overlay:
  lines w0.254: 4.1,11.3 4.1,14.5 4.5,14.5 ; 4.9,17.3 5.4,17.3 5.7,17 5.7,14.5
Top Solder:
  rectangle: 55.5,31.5 57.1,32.3
Board:
  the board outline again, w0.1
Plata:
  lines w0.1: 25,0 25,40.3 ; 34.5,0 34.5,40.3 ; 0,0 60.3,0 60.3,40.3 0,40.3 0,0

## Text inside footprints (layer, text, board x,y; h text height)
J1: Top Overlay "1" at 18.5,34.05 h1 r90; Top Overlay "8" at 17,3.7 h1 r90; Top Overlay "16" at 5.75,5.3 h1 r90; Top Overlay "9" at 5.75,33.8 h1 r90